# Altium PCB GSMModule.PcbDoc
Units mm, origin at the board's own origin, x right, y up, seen from the top; angles counter-clockwise.
Board outline 152.4 x 101.6 mm, 2 copper layers (Top Layer, Bottom Layer); 43 components, 30 nets, 225 pads, 0 vias.
Unrouted connection lines stored in the file: 125.
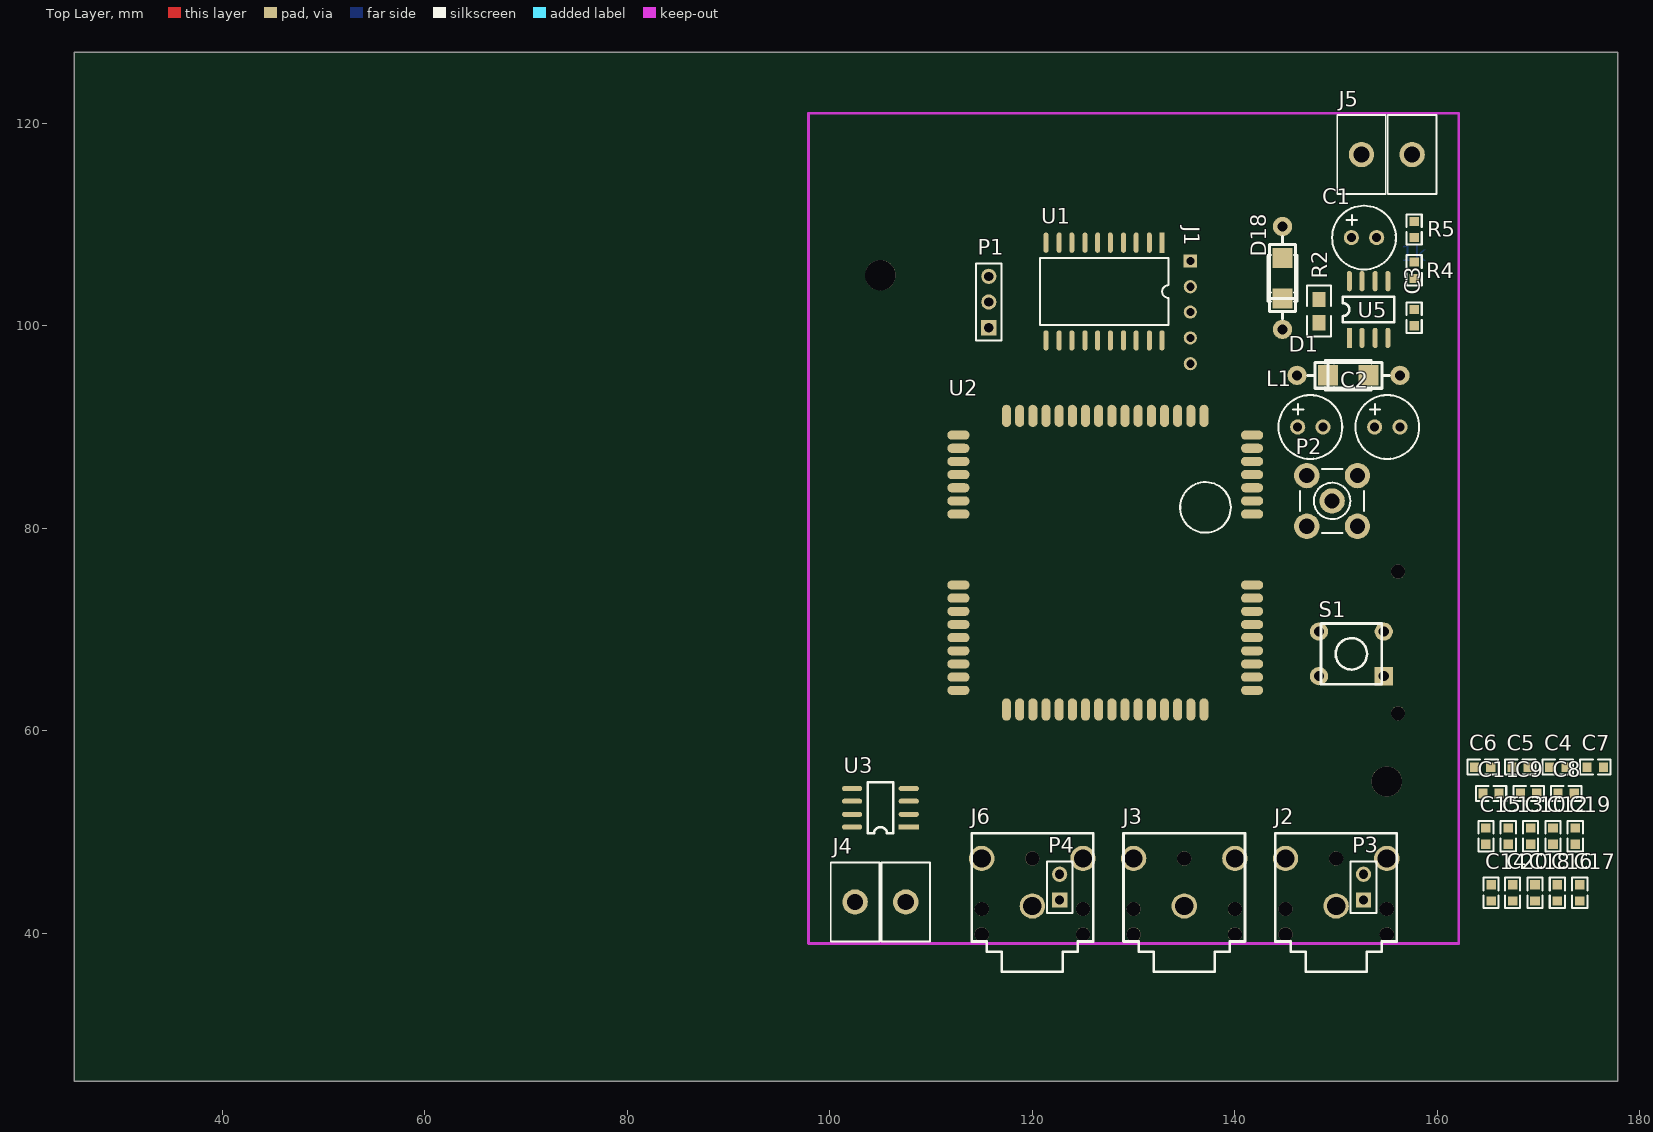
[diagram p0: Top Layer view]
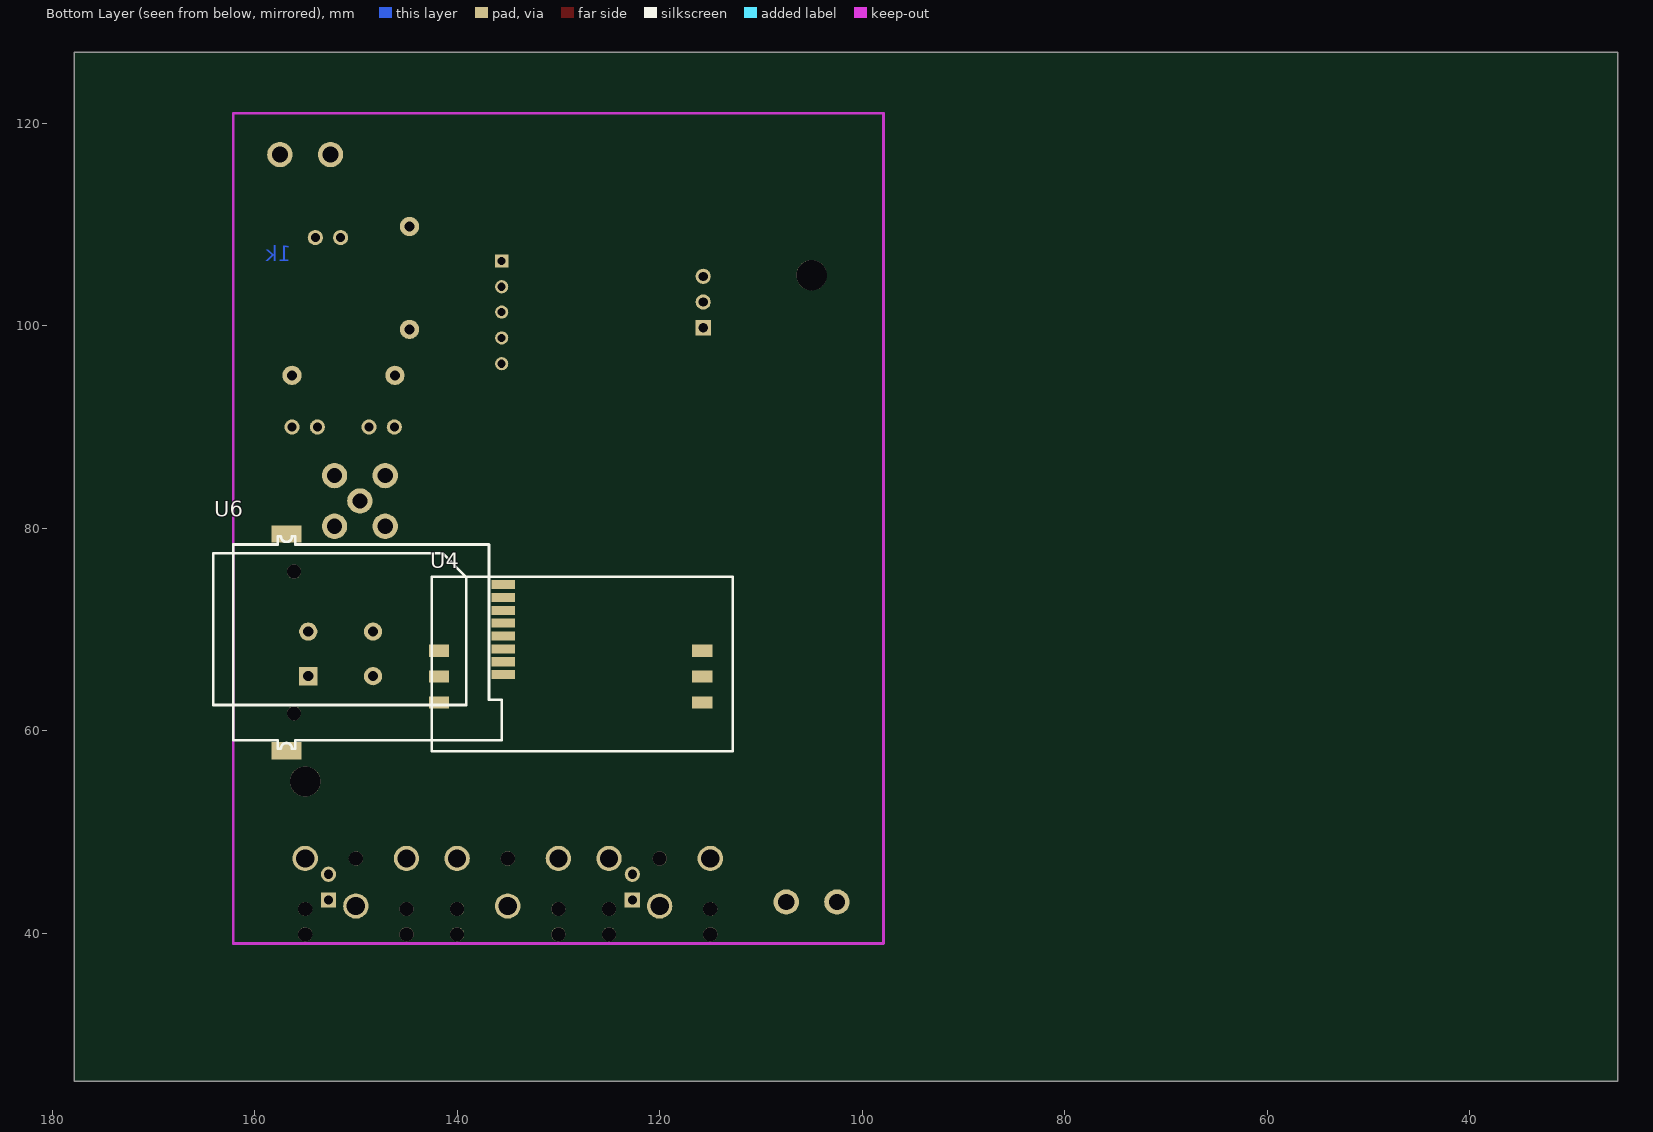
[diagram p1: Bottom Layer view, seen from below]

## Layer stack, top to bottom
Top Solder: solder mask 0.0102, Solder Resist, Dk 3.5
Top Layer: signal copper 0.0356
Dielectric1: dielectric 0.32, FR-4, Dk 4.8
Bottom Layer: signal copper 0.0356
Bottom Solder: solder mask 0.0102, Solder Resist, Dk 3.5

## Board outline
25.4,25.4 177.8,25.4 177.8,127 25.4,127

## Design rules (kind name [scope] priority, off if disabled: settings)
Clearance [All] p1: gap=0.3
ComponentClearance [All] p1: gap=0 collisioncheckmode=3 verticalgap=0 showdistances=FALSE
PolygonConnect [All] p1: connectstyle=Relief reliefconductorwidth=0.254 reliefentries=4 polygonreliefangle="90 Angle" airgapwidth=0.254
RoomDefinition GSMModule [InComponentClass('GSMModule')] p1: confinementstyle=ConfineIn formatcopy=TRUE lockcomponents=FALSE outline 32.766,25.527 177.8,25.527 177.8,126.873 32.766,126.873
RoutingVias [All] p1: holewidth=0.711 width=1.27 viastyle="Through Hole" minholewidth=0.711 minwidth=1.27 maxholewidth=0.711 maxwidth=1.27
SilkToSolderMaskClearance SilkscreenOverComponentPads [IsPad] p1: minsilkscreentomaskgap=0.254 clearancetoexposedcopper=TRUE
SolderMaskExpansion [All] p1: expansion=0.102
UnpouredPolygon [All] p1: allowunpoured=FALSE
Width [All] p1: maxlimit=0.254 minlimit=0.254 preferedwidth=0.254
27 further rules are at their usual default settings.

## Components (designator, comment, footprint, x,y, rotation, side; value= is the part's Value field where it differs from the comment)
C1 "100uF" "RA 6.3MM" 151.5,108.7 r0 top
C2 "470uF" "RA 6.3MM" 153.8,90 r0 top
C3 "1nF" 0603 157.7,100.8 r90 top
C4 "22uF" 0603 171.878,56.415 r0 top
C5 "10pF" 0603 168.17,56.415 r0 top
C6 "33pF" 0603 164.462,56.415 r0 top
C7 "10pF" 0603 175.586,56.415 r0 top
C8 "33pF" 0603 172.71,53.815 r0 top
C9 "10pF" 0603 169.002,53.815 r0 top
C10 "33pF" 0603 169.2,49.6 r90 top
C11 "10pF" 0603 165.294,53.815 r0 top
C12 "33pF" 0603 171.408,49.6 r90 top
C13 "10pF" 0603 166.992,49.6 r90 top
C14 "33pF" 0603 165.3,44 r90 top
C15 "10pF" 0603 164.784,49.6 r90 top
C16 "33pF" 0603 171.84,44 r90 top
C17 "10pF" 0603 174.048,44 r90 top
C18 "33pF" 0603 169.632,44 r90 top
C19 "10pF" 0603 173.616,49.6 r90 top
C20 "33pF" 0603 167.424,44 r90 top
D1 "DIODE SCHOTTKY" "DIODE0.4 + SMA" 156.3,95.1 r180 top
D18 "DIODE" "DIODE0.4 + SMA" 144.7,109.8 r270 top
J1 "CON5" "SIP5 - PGM" 135.6,106.4 r270 top
J2 "MIC Normal Ch." "Stereo Jack F" 150,38.2 r90 top
J3 "Speaker Normal Ch." "Stereo Jack F" 135,38.2 r90 top
J4 "CON2" "HD-515V 2P" 102.5,43.1 r0 top
J5 "CON2" "HD-515V 2P" 157.5,116.9 r180 top
J6 "EarPhones" "Stereo Jack F" 120,38.2 r90 top
L1 "220uH" "RA 6.3MM" 146.2,90 r0 top
P1 "Header 3" HDR1X3 115.7,99.8 r90 top
P2 "SMA" SMB_V-RJ45 149.6,82.7 r0 top
P3 "Header 2" HDR1X2 152.7,43.3 r90 top
P4 "Header 2" HDR1X2 122.7,43.3 r90 top
R2 "1" 0805 148.3,100.3 r90 top
R4 "2k2" 0603 157.7,105.475 r90 top
R5 "1k" 0603 157.7,109.5 r90 top
S1 "SW SPST" TACTBUT 151.5,67.6 r180 top
U1 "PIC16F1829" SOIC20WIDE 132.8,108.2 r270 top
U2 "Quectel M10" QUECTEL_M10 112.7,89.2 r0 top
U3 "31AP4991" SO-8 107.8,50.5 r180 top
U4 "SIM Holder" "SIM HOLDER" 115.8,62.8 r0 bottom
U5 "34063" SO-8 151.3,98.8 r90 top
U6 "SIM Holder PP" "SIM HOLDER PUSH" 162.1,79.2 r0 bottom

## Footprints (in the part's own frame and the unit in brackets; to place one, negate y for a bottom-side part, rotate by r counter-clockwise, add the part's x,y. Pads: shape width x height; smd on the part's side, far side on the other; paste and mask are expansions set on the pad)
0603 [mm]
  rect 0.9x0.95 smd: 1(-0.8,0) 2(0.8,0)
  silkscreen extent -1.5,-0.75 1.5,0.75
0805 [mm]
  rect 1.5x1.25 smd: 1(0,0) 2(2.3,0)
  silkscreen extent -1.35,-1.2 3.65,1.2
"DIODE0.4 + SMA" [mm]
  round 1.9 hole 1: A(0,0) K(10.16,0)
  rect 2x2 smd: A(3.1,0) K(7.1,0)
  silkscreen extent 1.02,-1.5 9.14,1.5
"HD-515V 2P" [mm]
  round 2.5 hole 1.6: 1(0,0) 2(5,0)
  silkscreen extent -2.4,-3.9 7.4,3.9
HDR1X2 [mm] "Connector; Header; 2 Position"
  rect 1.5x1.5 hole 0.9: 1(0,0)
  round 1.5 hole 0.9: 2(2.54,0)
  silkscreen extent -1.27,-1.27 3.81,1.27
HDR1X3 [mm] "Connector; Header; 3 Position"
  rect 1.5x1.5 hole 0.9: 1(0,0)
  round 1.5 hole 0.9: 2(2.54,0) 3(5.08,0)
  silkscreen extent -1.27,-1.27 6.35,1.27
QUECTEL_M10 [mm] "GSM Module Quectel M10"
  oval 2.2x0.9 smd: 1(0,0) 2(0,-1.3) 3(0,-2.6) 4(0,-3.9) 5(0,-5.2) 6(0,-6.5) 7(0,-7.8) 8(0,-14.8) 9(0,-16.1) 10(0,-17.4) 11(0,-18.7) 12(0,-20) 13(0,-21.3) 14(0,-22.6) 15(0,-23.9) 16(0,-25.2) 33(29,-25.2) 34(29,-23.9) 35(29,-22.6) 36(29,-21.3) 37(29,-20) 38(29,-18.7) 39(29,-17.4) 40(29,-16.1) 41(29,-14.8) 42(29,-7.8) 43(29,-6.5) 44(29,-5.2) 45(29,-3.9) 46(29,-2.6) 47(29,-1.3) 48(29,0)
  oval 0.9x2.2 smd: 17(4.75,-27.1) 18(6.05,-27.1) 19(7.35,-27.1) 20(8.65,-27.1) 21(9.95,-27.1) 22(11.25,-27.1) 23(12.55,-27.1) 24(13.85,-27.1) 25(15.15,-27.1) 26(16.45,-27.1) 27(17.75,-27.1) 28(19.05,-27.1) 29(20.35,-27.1) 30(21.65,-27.1) 31(22.95,-27.1) 32(24.25,-27.1) 49(24.25,1.9) 50(22.95,1.9) 51(21.65,1.9) 52(20.35,1.9) 53(19.05,1.9) 54(17.75,1.9) 55(16.45,1.9) 56(15.15,1.9) 57(13.85,1.9) 58(12.55,1.9) 59(11.25,1.9) 60(9.95,1.9) 61(8.65,1.9) 62(7.35,1.9) 63(6.05,1.9) 64(4.75,1.9)
  silkscreen extent 21.9,-9.64 26.9,-4.64
"RA 6.3MM" [mm]
  round 1.5 hole 0.9: 1(0,0) 2(2.5,0)
  silkscreen extent -1.9,-3.15 4.4,3.15
"SIM HOLDER" [mm] "SIM Holder Without Card Presence (SIMH 2)"
  rect 2x1.2 smd: 1(0,0) 2(0,-2.55) 3(0,-5.1) 4(26,-5.1) 5(26,-2.55) 6(26,0)
  silkscreen extent -3,-12.4 26.7,4.8
"SIM HOLDER PUSH" [mm] "Sim Holder Push-Push"
  round 1.4 hole 1.4: 0(-6,3.475) 0(-6,17.475)
  rect 2.3x0.9 smd: 1(-26.65,13.65) 2(-26.65,11.11) 3(-26.65,8.57) 5(-26.65,12.38) 6(-26.65,9.84) 7(-26.65,7.3) COM(-26.65,4.76) D(-26.65,6.03)
  rect 3x1.7 smd: 5(-5.25,-0.225) 5(-5.25,21.175)
  silkscreen extent -26.5,0 2,20.95
"SIP5 - PGM" [mm]
  rect 1.3x1.3 hole 0.8: 1(0,0)
  round 1.3 hole 0.8: 2(2.55,0) 3(5.05,0) 4(7.6,0) 5(10.15,0)
SMB_V-RJ45 [mm] "Connector; SMB Straight"
  round 2.5 hole 1.5: 1(0,0) 2(-2.5,-2.5) 2(-2.5,2.5) 2(2.5,-2.5) 2(2.5,2.5)
  silkscreen extent -3.15,-3.15 3.15,3.15
SO-8 [mm]
  rect 2x0.5 smd: 1(0,0)
  oval 2x0.5 smd: 2(0,-1.25) 3(0,-2.55) 4(0,-3.8) 5(5.6,-3.8) 6(5.6,-2.55) 7(5.6,-1.25) 8(5.6,0)
  silkscreen extent 1.52,-4.44 4.06,0.64
SOIC20WIDE [mm]
  rect 2x0.5 smd: 1(0,0)
  oval 2x0.5 smd: 2(0,-1.25) 3(0,-2.55) 4(0,-3.8) 5(0,-5.1) 6(0,-6.35) 7(0,-7.6) 8(0,-8.9) 9(0,-10.15) 10(0,-11.45) 11(9.65,-11.45) 12(9.65,-10.15) 13(9.65,-8.9) 14(9.65,-7.6) 15(9.65,-6.35) 16(9.65,-5.1) 17(9.65,-3.8) 18(9.65,-2.55) 19(9.65,-1.25) 20(9.65,0)
  silkscreen extent 1.52,-12.06 8.13,0.65
"Stereo Jack F" [mm] "Female Stereo Jack YPJ-8174X"
  round 1.4 hole 1.4: 0(1.7,-5) 0(1.7,5) 0(4.2,-5) 0(4.2,5) 0(9.2,0)
  round 2.5 hole 1.8: 1(4.5,0) 2(9.2,-5) 5(9.2,5)
  silkscreen extent -2,-6 11.7,6
TACTBUT [mm]
  rect 1.8x1.8 hole 1: 1(-3.2,2.2)
  round 1.8 hole 1: 1(3.2,2.2) 2(-3.2,-2.2) 2(3.2,-2.2)
  silkscreen extent -3,-3 3,3

## Part data
C1 C2: library part "CAPACITOR POL", "Capacitor"
C3 C4 C5 C6 C7 C8 C9 C10 C11 C12 C13 C14 C15 C16 C17 C18 C19 C20: library part CAP, "Capacitor"
D1: "Schottky Diode"
D18: "Diode"
J1 J4 J5: "Connector"
J2 J3 J6: library part Phonejack3, "Jack Socket, 1/4\" [6.5mm], Thru-Hole, Vertical, 3-Conductor Open Circuit (Non-Normalling)"
L1: library part INDUCTOR1
P1: "Header, 3-Pin"
P2: library part SMB, "SMB Straight Connector"
P3 P4: "Header, 2-Pin"
R2 R4 R5: library part RES2
U1: "Microchip Microcontroller"
U2: "GSM Module Quectel M10"
U3: library part "Differential Amplifier", "Op-amp with differential inputs"
U4: "6-Pin SIM Holder"
U5: "DC/DC converter"
U6: "8-Pin SIM Holder Push-Push"

## Free pads (board coordinates)
  round 3 hole 3: 0(105,105) 0(155,55)

## Nets (pads, with @x,y where several pads share a name; then routed paths per layer and width w, separated by ;. In a path a pad name is that pad's centre, name@x,y a point inside that pad or via, vN(x,y) a via of type N, cw(c..) or ccw(c..) an arc to the next point about the centre after c; other vN are vias at no path point)
4V: C2.1 J1.2 L1.2 R4.1 U1.1 U2.50 U2.51 U2.52 U3.7 U3.8
AGND: J6.1 P4.1 U2.19 U2.26
BUZZER: U2.39
GND: C1.2 C2.2 C3.2 C5.1 C6.1 C7.1 C8.1 C9.1 C10.1 C11.1 C12.1 C17.2 C18.2 C19.2 C20.2 D1.A J1.3 J5.1 P1.1 P2.2 pad.0@155,55 R5.2 S1.2 U1.20 U2.8 U2.42 U2.44 U2.45 U2.46 U2.47 U2.48 U2.49 U2.58 U3.4 U4.1 U5.4 U6.5
MCLR: J1.1 U1.4
MIC1N: C13.2 C14.2 C17.1 C18.1 J2.1 P3.1 U2.24
MIC1P: C9.2 C10.2 C13.1 C14.1 J2.2 J2.5 P3.2 U2.23
MIC2P: C5.2 C6.2 J6.2 P4.2 U2.25
NetC3_1: C3.1 U5.3
NetD1_K: D1.K L1.1 U5.2
NetR2_1: R2.1 U5.1 U5.7 U5.8
NetR4_2: R4.2 R5.1 U5.5
PGC: J1.5 U1.18
PGD: J1.4 U1.19
POWER: D18.A J5.2
POWER_ON: S1.1 U1.11 U2.18
RF_ANT: P2.1 U2.43
RX: P1.3 U1.12 U2.60
SIM_CLK: U2.14 U4.4 U6.3
SIM_DAT: U2.13 U4.3 U6.D
SIM_RST: U2.15 U4.5 U6.2
SIM_VDD: U2.12 U4.6 U6.1
SPK1N: C15.2 C16.2 C19.1 C20.1 J3.1 U2.21 U3.3
SPK1P: C11.2 C12.2 C15.1 C16.1 J3.2 J3.5 U2.22 U3.1
SPK2P: C4.2 C7.2 C8.2 J6.5
SPK2P_M: C4.1 U2.20
SPKOUTN: J4.1 U3.6
SPKOUTP: J4.2 U3.2
TX: P1.2 U1.10 U2.61
VCC: C1.1 D18.K R2.2 U5.6
pads on no net: J2.0 J3.0 J6.0 U1.2 U1.3 U1.5 U1.6 U1.7 U1.8 U1.9 U1.13 U1.14 U1.15 U1.16 U1.17 U2.1 U2.2 U2.3 U2.4 U2.5 U2.6 U2.7 U2.9 U2.10 U2.11 U2.16 U2.17 U2.27 U2.28 U2.29 U2.30 U2.31 U2.32 U2.33 U2.34 U2.35 U2.36 U2.37 U2.38 U2.40 U2.41 U2.53 U2.54 U2.55 U2.56 U2.57 U2.59 U2.62 U2.63 U2.64 U3.5 U4.2 U6.0 U6.6 U6.7 U6.COM

## Keep-outs
Keep-Out Layer:
  lines w0.254: 97.9,39 130,39 162.1,39 162.1,56.8 162.1,88.9 162.1,121 130,121 97.9,121 97.9,103.2 97.9,71.1 97.9,39